# EAGLE board EpleyUnoMotorShield (EAGLE 7.5.0)
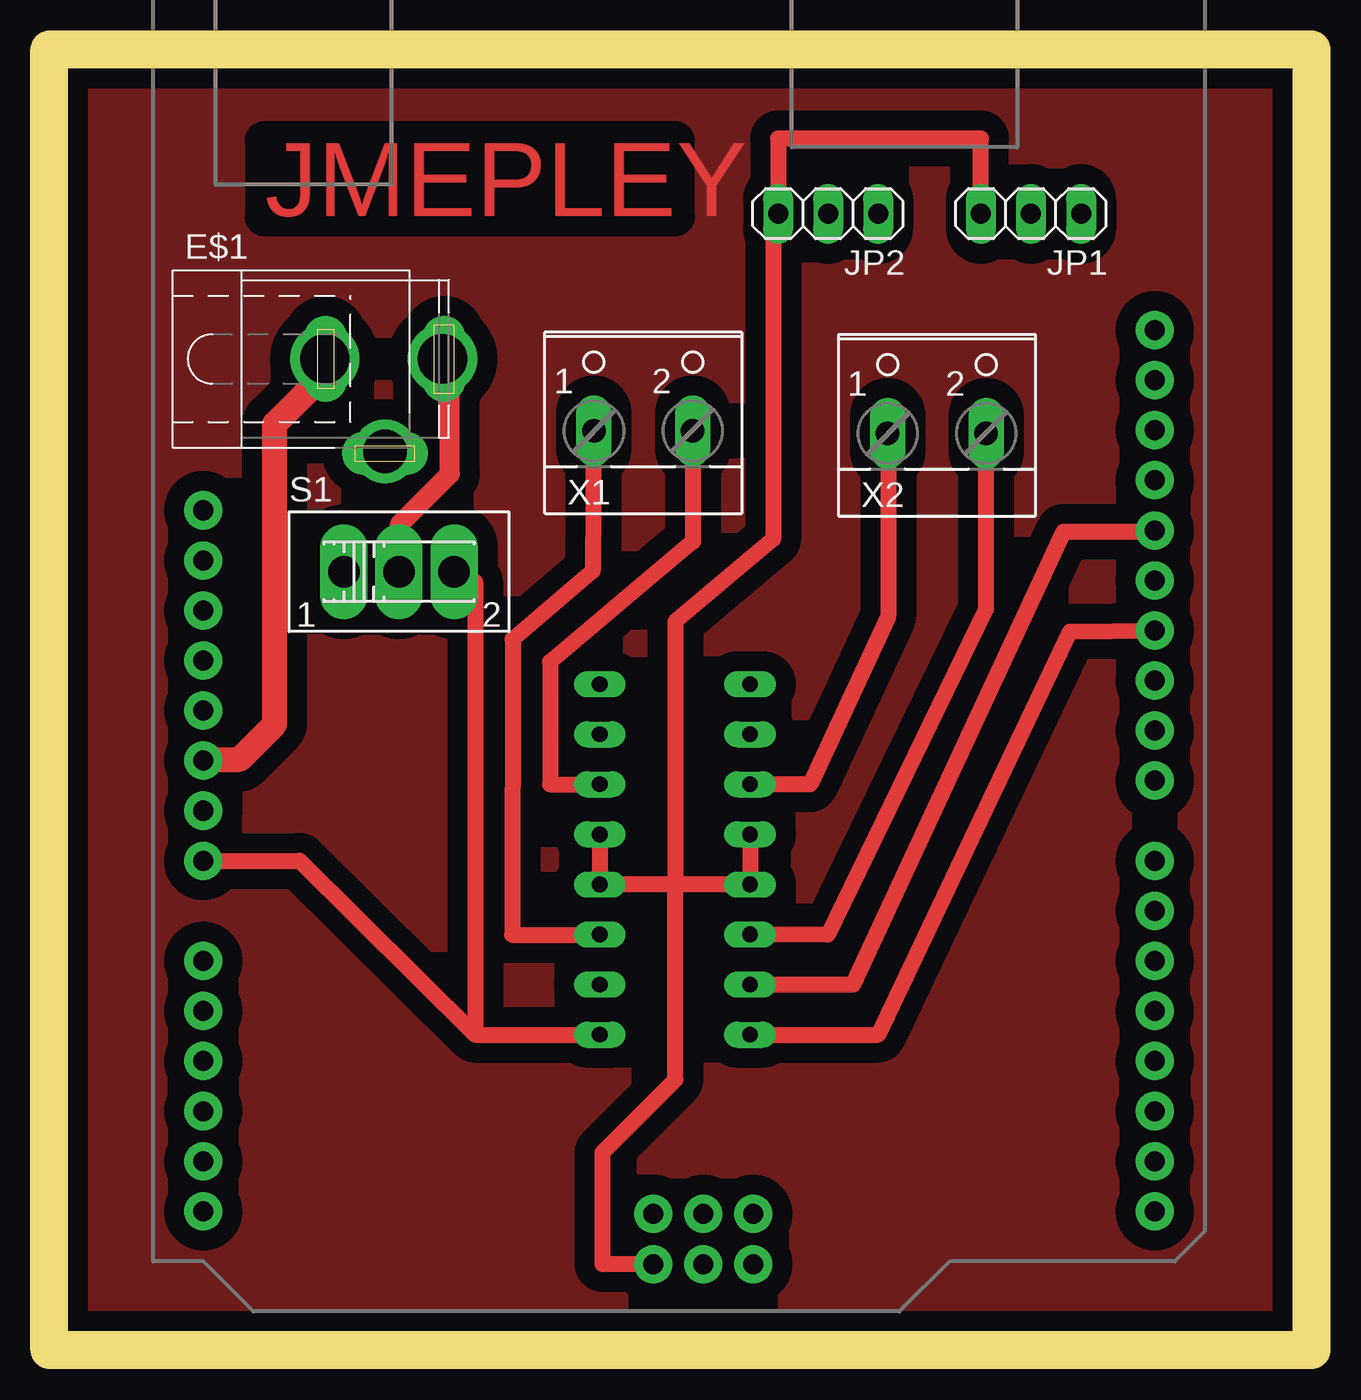
[diagram p0: board, top side]
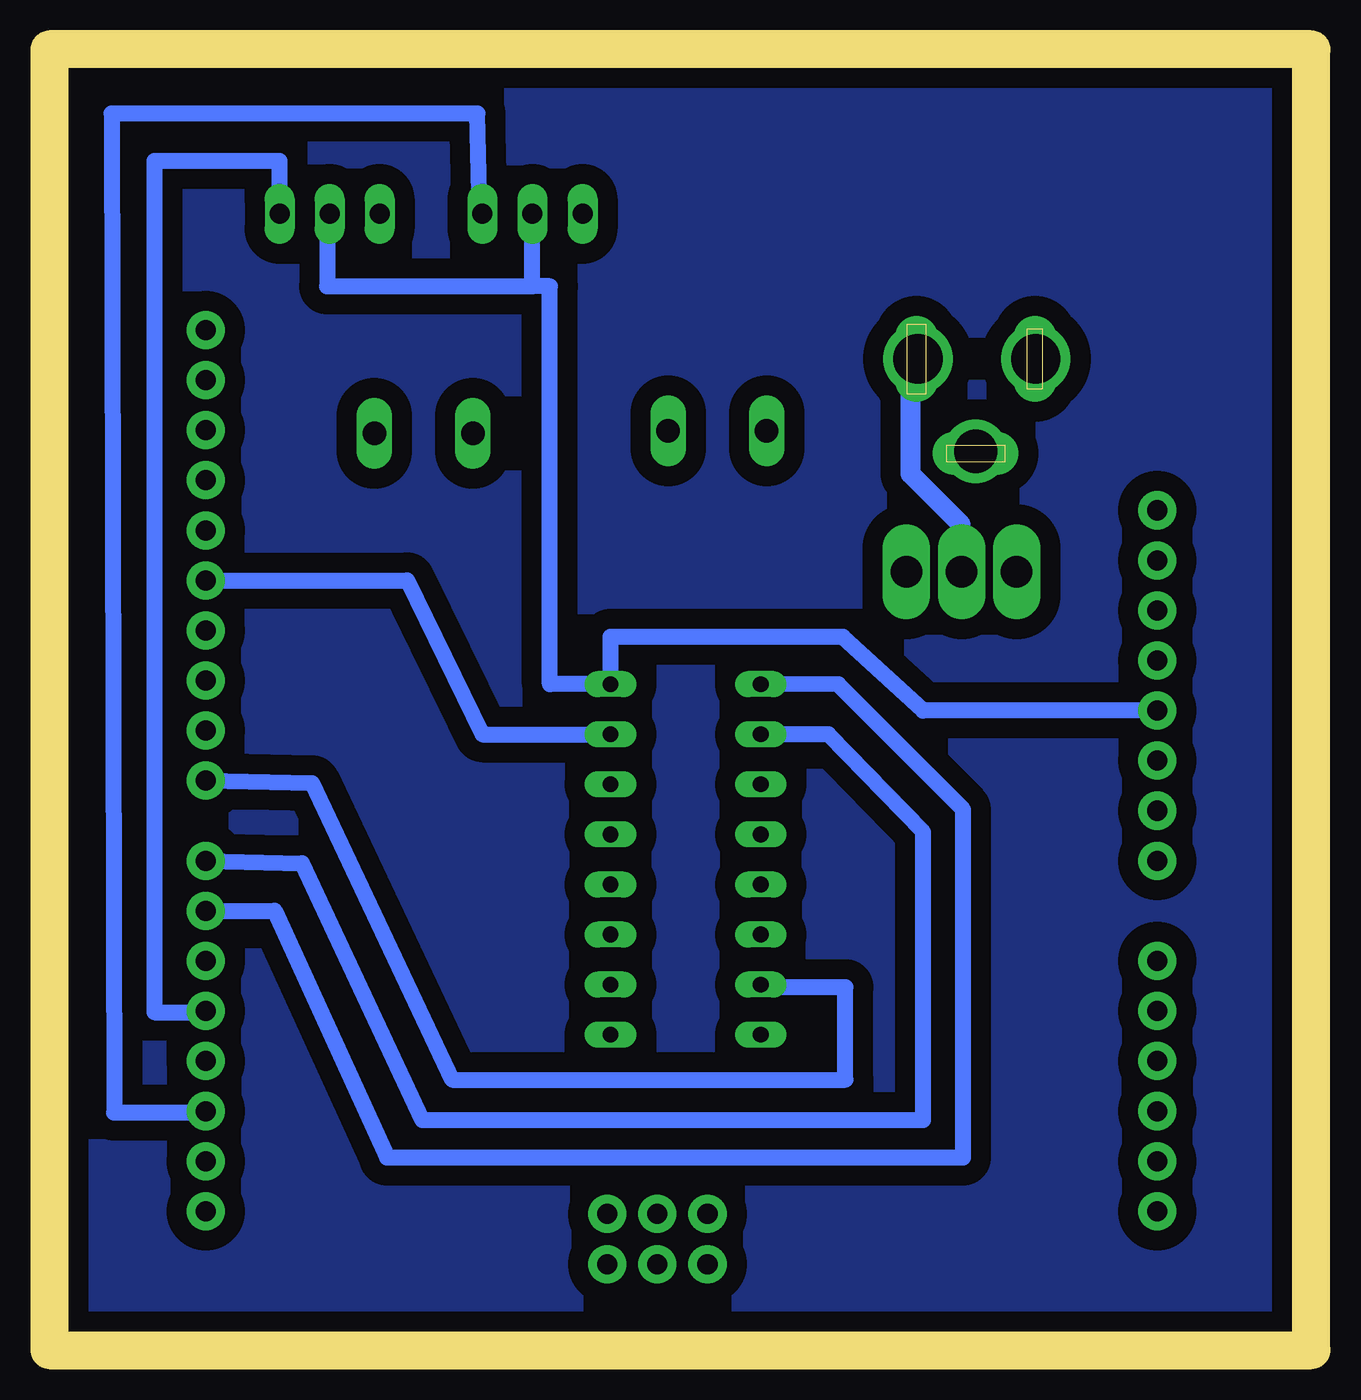
[diagram p1: board, bottom side, seen from below]

Size 64 x 66 mm. Coordinates in mm from the lower left corner, seen from the top.
Outline: 0,0 0,66 64,66 64,0 0,0
Copper layers (1*16): Top 0.035mm / dielectric 1.5mm / Bottom 0.035mm
Design rules "default": minimum track width 10mil, minimum drill 24mil, track to track 8mil, track to pad 8mil, pad to pad 8mil, via to via 8mil, smd to smd 8mil, copper to edge 40mil, drill to drill 8mil, minimum pad ring 10mil, minimum via ring 8mil, stop-mask expansion 4mil, vias tented up to drill 0mil, thermal gap 10mil

## Footprints (pad centres in the part's own frame; a part is rotated, then mirrored left to right if it is on the bottom)
5.5-2.5-BARRELCONNECTOR = drill 0.8 pad 2.184 long: 1 -3,0; 2 0,-4.8 | drill 1 pad 2.184 long: 3 3,0 | drill 2.5: P$1 -3.048,0; P$2 2.921,0 | drill 2.2: P$3 0,-4.699
ARDUINO_R3 = drill 1.016 pad 1.93: 3.3V 35.56,2.54; 5V 38.1,2.54; A0 50.8,2.54; A1 53.34,2.54; A2 55.88,2.54; A3 58.42,2.54; A4 60.96,2.54; A5 63.5,2.54; AREF 23.876,50.8; D0 63.5,50.8; D1 60.96,50.8; D2 58.42,50.8; D3 55.88,50.8; D4 53.34,50.8; D5 50.8,50.8; D6 48.26,50.8; D7 45.72,50.8; D8 41.656,50.8; D9 39.116,50.8; D10 36.576,50.8; D11 34.036,50.8; D12 31.496,50.8; D13 28.956,50.8; GND@1 40.64,2.54; GND@2 43.18,2.54; GND@3 26.416,50.8; GND@4 66.18,25.35; IOREF 30.48,2.54; MISO 63.64,30.43; MOSI 66.18,27.89; NC 27.94,2.54; RESET@1 33.02,2.54; RESET@2 63.64,25.35; SCK 63.64,27.89; SCL 18.796,50.8; SDA 21.336,50.8; VCC 66.18,30.43; VIN 45.72,2.54
1X03 = drill 1.016 long: 1 -2.54,0; 2 0,0; 3 2.54,0
SLIDE_SWITCH = drill 1.6 long: 1 -2.794,0; 2 0,0; 3 2.794,0
DIP16 = drill 0.8 long: P1 -8.89,-3.81; P2 -6.35,-3.81; P3 -3.81,-3.81; P4 -1.27,-3.81; P5 1.27,-3.81; P6 3.81,-3.81; P7 6.35,-3.81; P8 8.89,-3.81; P9 8.89,3.81; P10 6.35,3.81; P11 3.81,3.81; P12 1.27,3.81; P13 -1.27,3.81; P14 -3.81,3.81; P15 -6.35,3.81; P16 -8.89,3.81
2PIN-SCREW-TERMINAL = drill 1.194 long: 1 -2.5,-1.27; 2 2.5,-1.27

## Placement (x,y rotation side)
E$1  [5.5-2.5-BARRELCONNECTOR]  17.02,50.29 0 top
J1  ARDUINO_UNO_R3  [ARDUINO_R3]  5.27,70.55 270 top
JP1  [1X03]  49.78,57.66 180 top
JP2  [1X03]  39.5,57.66 180 top
S1  [SLIDE_SWITCH]  17.73,39.5 0 top
U$1  MOTOR_DRIVERDIP16  [DIP16]  31.73,24.9 270 top
X1  [2PIN-SCREW-TERMINAL]  30.12,47.91 0 top
X2  [2PIN-SCREW-TERMINAL]  45.01,47.78 0 top

## Library data of the parts
E$1 J1 JP1 JP2 S1 U$1 = ISCTRainingProgram
X1 X2 = ISCTRainingProgram; MPN: 237-102; OC_FARNELL: unknown; OC_NEWARK: 70K9898

## Nets
1A: J1.D7 U$1.P2
2A: J1.D8 U$1.P7
3A: J1.D13 U$1.P10
4A: J1.D12 U$1.P15
EN1: J1.D6 U$1.P1
EN2: J1.D11 U$1.P9
GND: J1.GND@4 JP1.3 JP2.3 U$1.P4 U$1.P5 U$1.P12 U$1.P13
N$1: U$1.P6 X1.1
N$2: U$1.P3 X1.2
N$3: U$1.P14 X2.1
N$4: U$1.P11 X2.2
N$5: J1.D2 JP2.1
N$7: J1.VIN S1.3 U$1.P8
N$11: J1.D4 JP1.1
N$12: J1.5V JP1.2 JP2.2 U$1.P16

## Tracks (layer width: path | path; a pad name or v marks a point on that pad's centre or on a via)
1A
  Bottom 0.813: J1.D7 51.18,24.7 45.09,11.68 19.68,11.68 19.68,26.29 24.49,31.24 U$1.P2
2A
  Bottom 0.813: J1.D8 50.67,28.77 43.56,13.72 23.62,13.72 23.62,18.41 27.92,18.41 U$1.P7
3A
  Top 0.813: U$1.P10 40.77,18.55 51.44,41.53 56.07,41.53 J1.D13
4A
  Bottom 0.813: J1.D12 45.85,39.05 42.04,31.24 U$1.P15
EN1
  Bottom 0.813: J1.D6 52.58,22.29 46.86,9.78 17.65,9.78 17.65,27.43 23.98,33.78 U$1.P1
EN2
  Top 0.813: U$1.P9 41.91,16.01 42.04,16 51.75,36.45 J1.D11
GND
  Top 0.813: U$1.P4 U$1.P5 31.75,23.63 | U$1.P13 U$1.P12 31.75,23.63 | J1.GND@4 28.07,4.37 28.07,10.03 31.75,13.72 31.75,23.63 | JP1.3 47.24,61.47 36.96,61.47 JP2.3 36.7,57.4 36.7,41.15 31.75,36.96 31.75,23.63
N$1
  Top 0.813: X1.1 27.56,39.53 23.5,36.07 23.48,21.08 U$1.P6
N$2
  Top 0.813: X1.2 32.64,44.99 32.64,41.02 25.4,34.92 25.4,28.7 U$1.P3
N$3
  Top 0.813: X2.1 42.55,45.12 42.55,37.21 38.59,28.7 U$1.P14
N$4
  Top 0.813: X2.2 47.5,44.99 47.5,37.59 39.48,21.08 U$1.P11
N$5
  Bottom 0.813: JP2.1 42.16,57.66 42.29,62.74 60.83,62.74 60.71,12.06 56.07,12.06 J1.D2
N$7
  Top 0.813: J1.VIN 12.7,24.83 21.59,16 | 21.59,16 U$1.P8 | S1.3 21.59,38.99 21.59,16
N$11
  Bottom 0.813: JP1.1 52.32,60.33 58.67,60.33 58.67,17.14 56.07,17.14 J1.D4
N$12
  Bottom 0.813: JP1.2 49.91,57.66 49.91,53.98 39.5,53.98 | 39.5,53.98 JP2.2 | J1.5V 19.68,32.45 23.75,36.2 35.54,36.2 U$1.P16 38.61,33.79 38.61,53.98 39.5,53.98
S$1
  Top 1.27: 7.75,29.97 9.65,29.97 11.43,31.75 11.43,46.99 13.97,49.53
S$2
  Top 1.016: 17.78,40.64 17.78,41.91 20.32,44.45 20.32,49.53
S$3
  Bottom 1.016: 17.78,40.64 17.78,41.91 20.32,44.45 20.32,49.53
S$4
  pour Bottom (isolate 1.016): 0,66.04 63.5,66.04 63.5,0 0,0
S$5
  pour Top (isolate 1.016): 0,66.04 63.5,66.04 63.5,0 0,0

## Text on the board
Top: JMEPLEY